# Allegro board CHOPPING_WAVE.brd
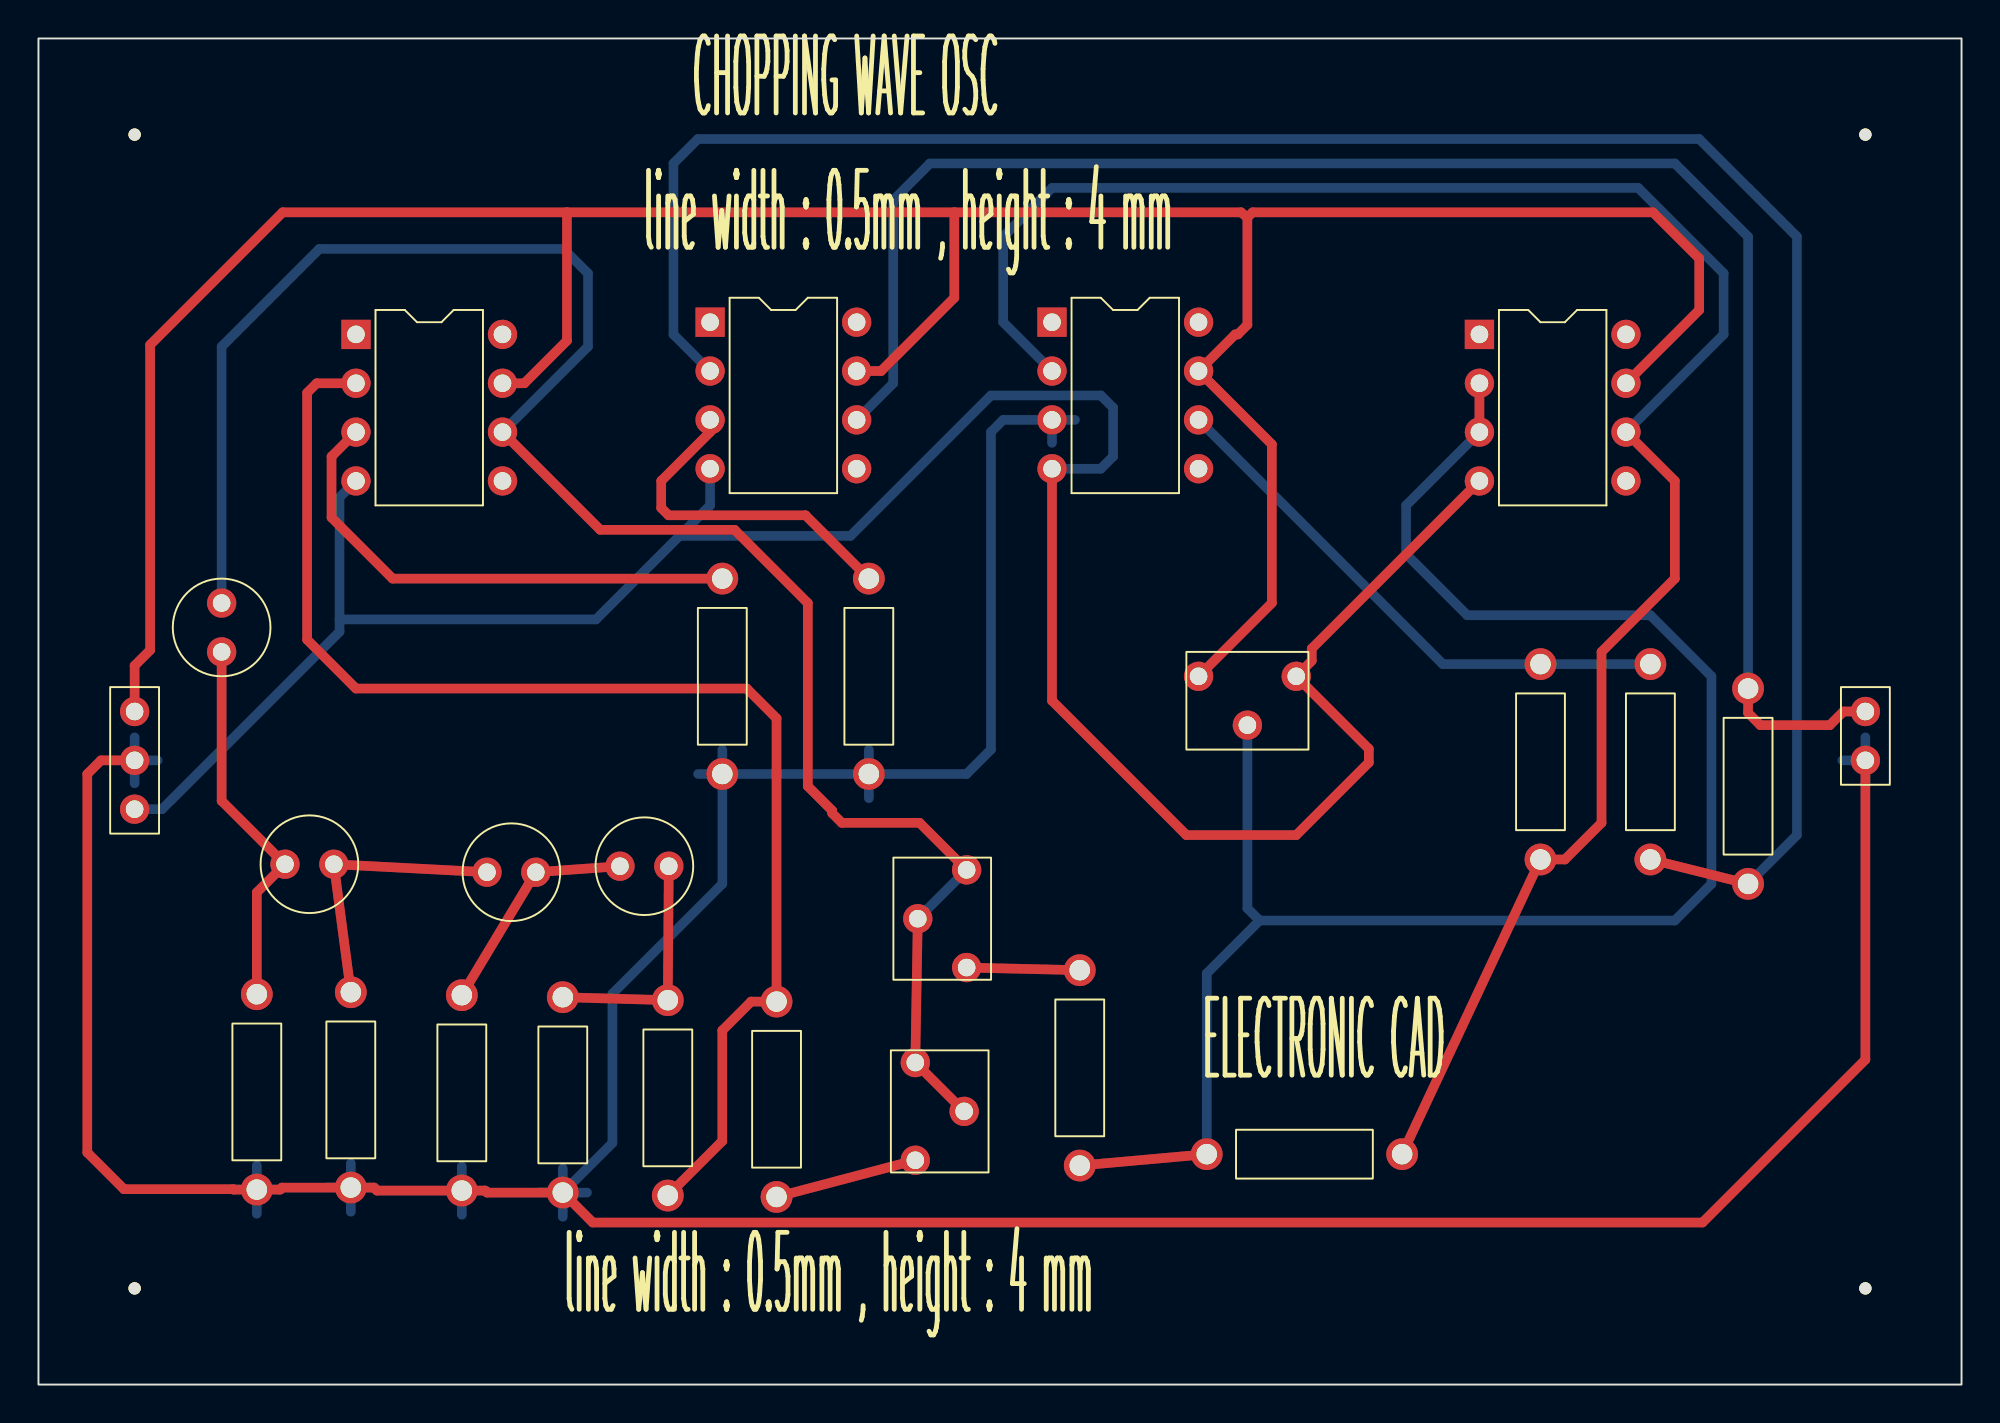
[diagram p0: board, top side]
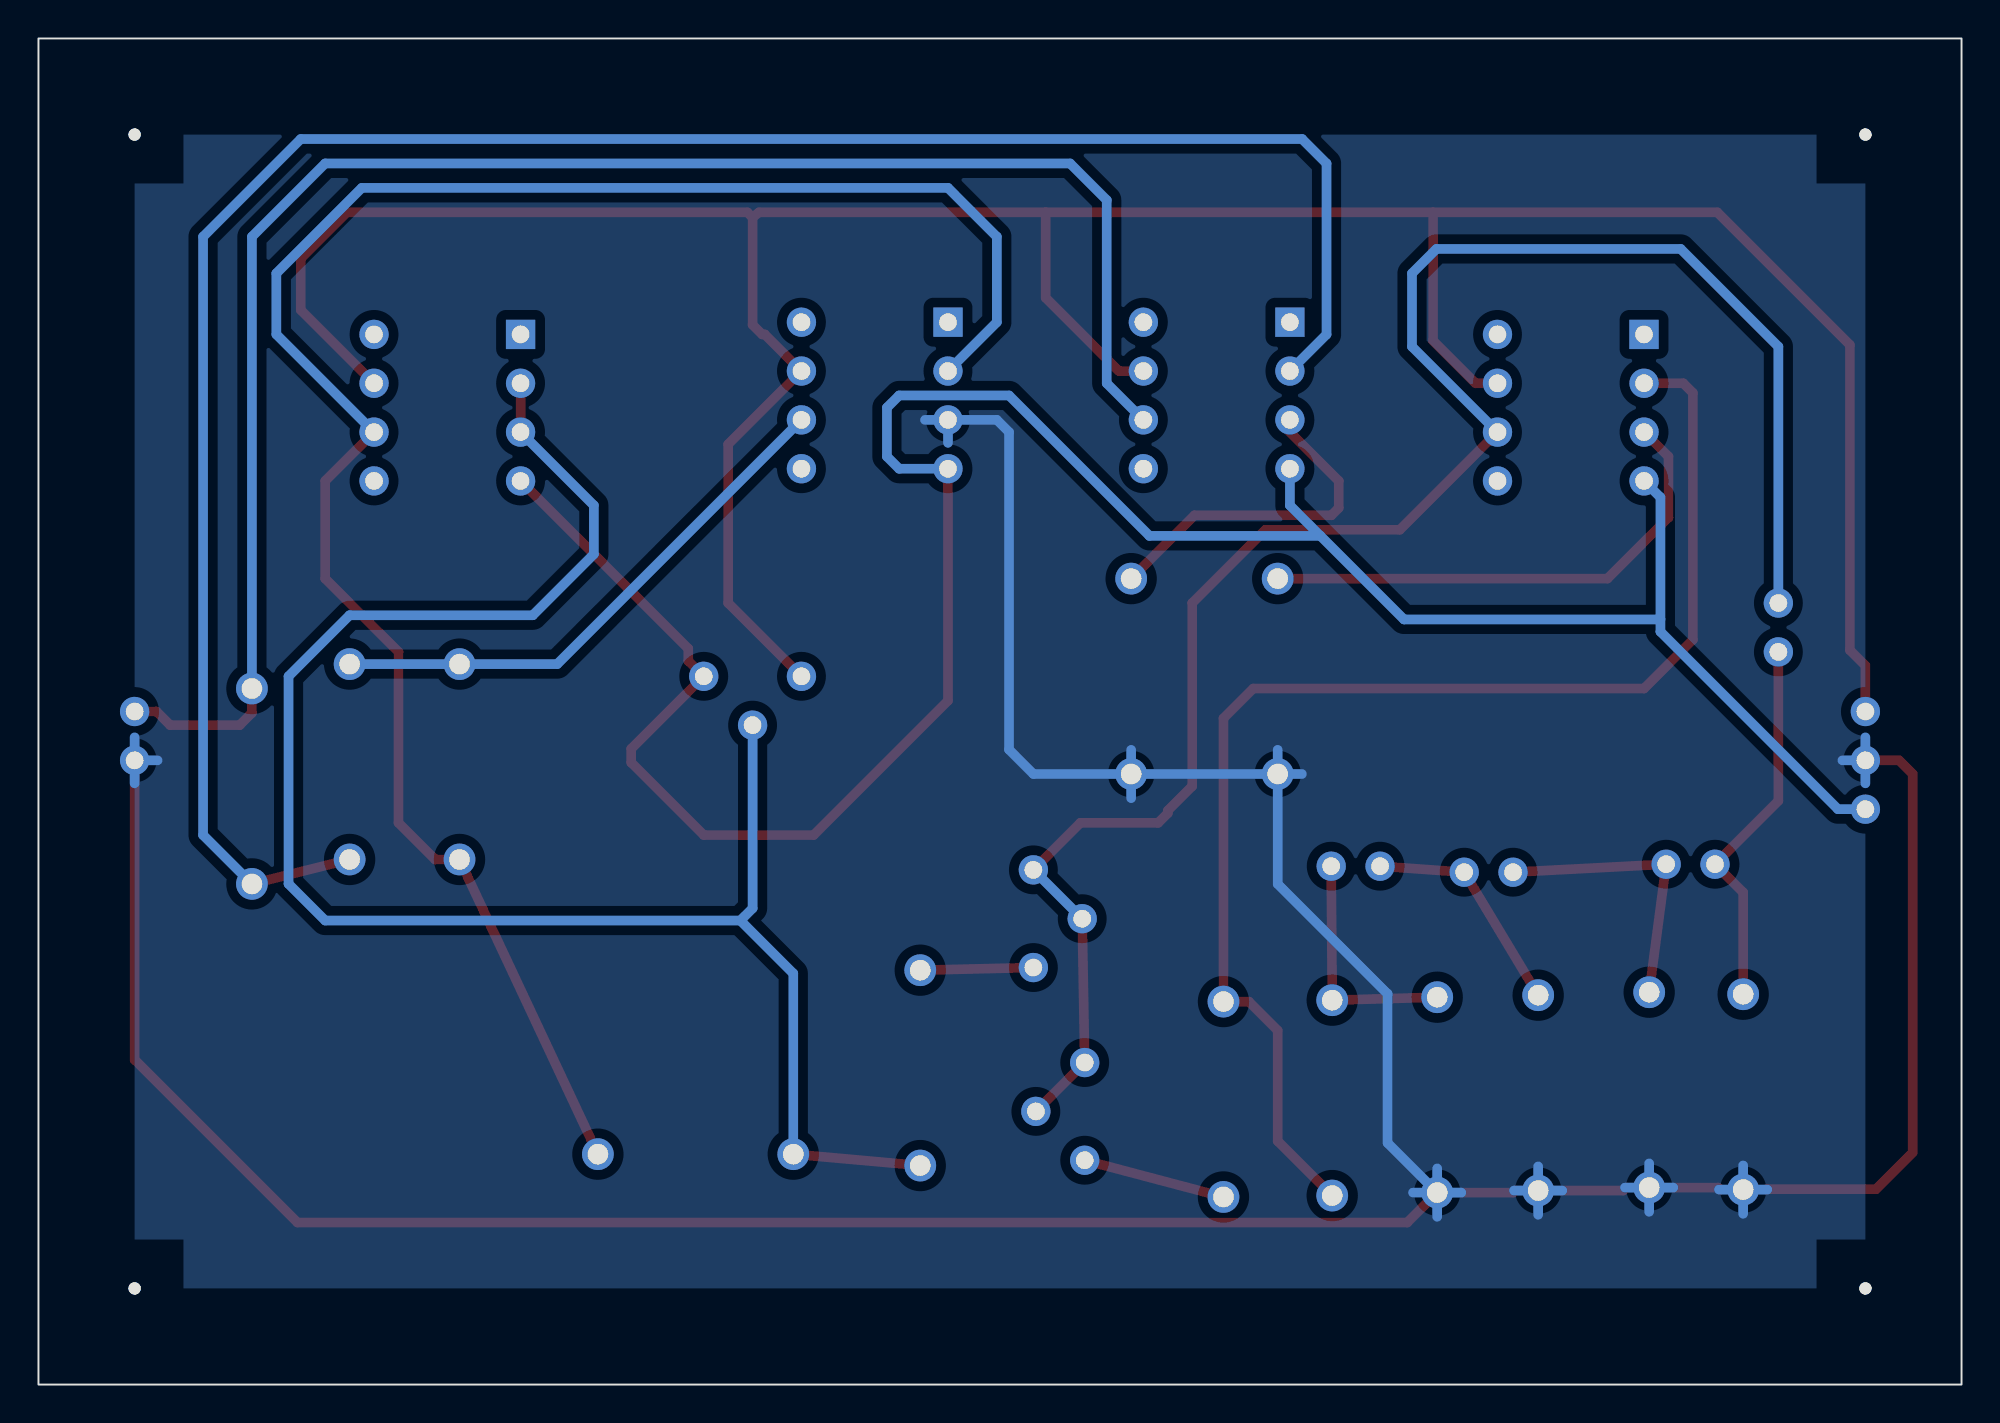
[diagram p1: board, bottom side, seen from below]

Outline 100 x 70 mm; copper layers: TOP, BOTTOM. Coordinates in mm from the lower left corner of the outline.
Outline path: rectangle 0,0 100,70

## Design rules (mm)
net group POWERRULL: nets +12V -12V
nets with their own width: min track width 0.5; nets GND N00433 N00446 N00467 N00486 N00513 N00553 N00614 N00638 N00732 N00786 N01578 N01624 N01649 OUT SIG

## Placement (name value [footprint] x y rotation side)
C1  0.001uF  [CAP196]  9.53 40.64 180 top
C2  0.001uF  [CAP196]  15.36 27.06 90 top
C3  0.001uF  [CAP196]  25.86 26.64 90 top
C4  0.001uF  [CAP196]  32.78 26.95 90 top
J1  CON2  [JUMPER2]  95 35 270 top
J2  CON3  [JUMPER3]  5 35 270 top
NOREF  -  []  100 0 90 top
NOREF#2  -  [unnamed#2]  95 5 0 top
NOREF#3  -  [unnamed#2]  95 65 0 top
NOREF#4  -  [unnamed#2]  5 65 0 top
NOREF#5  -  []  0 70 0 top
NOREF#6  -  [unnamed#2]  5 5 0 top
R1  4.7k  [RES400]  11.36 20.3 180 top
R2  4.7k  [RES400]  16.24 20.4 180 top
R3  4.7k  [RES400]  22.02 20.25 180 top
R4  4.7k  [RES400]  27.27 20.14 180 top
R5  10k  [RES400]  32.73 19.99 180 top
R6  1k  [RES400]  35.56 41.91 180 top
R7  15k  [RES400]  38.38 9.76 0 top
R8  20k  [RES400]  54.15 21.55 180 top
R9  10k  [RES400]  60.75 11.98 270 top
R10  470k  [RESADJ]  45.59 11.66 180 top
R11  100k  [RESADJ]  48.27 26.77 0 top
R12  10k  [RESADJ]  60.33 36.83 90 top
R13  8.2k  [RES400]  78.11 27.3 0 top
R14  2.2k  [RES400]  83.82 37.47 180 top
R15  10k  [RES400]  88.9 26.04 0 top
R16  5.1k  [RES400]  43.18 31.75 0 top
U1  LF356  [DIP8_3]  16.51 54.61 0 top
U2  LF356  [DIP8_3]  74.93 54.61 0 top
U3  LF356  [DIP8_3]  52.7 55.24 0 top
U4  LF356  [DIP8_3]  34.92 55.24 0 top

## Library data of the parts
C1-C4 = CAP NP: Tolerance: ***; User Part Number: ***
J1 = CON2: User Part Number: ***
J2 = CON3: User Part Number: ***
R1-R9 R13-R16 = R: Tolerance: ***; User Part Number: ***
R10-R12 = RESISTOR VAR: Tolerance: ***; User Part Number: ***
U1-U4 = LF356_0: Tolerance: ***; User Part Number: ***

## Footprints (pads in the part's own frame, mm; a bottom-side part is the same pattern mirrored in y, then rotated)
CAP196
  round 1.524 hole 0.914: 1(0,0) 2(0,2.54)
DIP8_3
  rect 1.524x1.524 hole 0.914: 1(0,0)
  round 1.524 hole 0.914: 2(0,-2.54) 3(0,-5.08) 4(0,-7.62) 5(7.62,-7.62) 6(7.62,-5.08) 7(7.62,-2.54) 8(7.62,0)
JUMPER2
  round 1.524 hole 0.914: 1(0,0) 2(2.54,0)
JUMPER3
  round 1.524 hole 0.914: 1(0,0) 2(2.54,0) 3(5.08,0)
RES400
  round 1.651 hole 1.067: 1(0,0) 2(0,10.16)
RESADJ
  round 1.524 hole 0.914: 1(0,0) 2(-2.54,-2.54) 3(0,-5.08)
unnamed#2
  round 0.635 hole 3.175 unplated: (0,0)

## Nets
+12V: J2.1 R12.1 U1.7 U2.7 U3.7 U4.7
-12V: J2.3 R12.3 U1.4(V-) U2.4(V-) U3.4(V-) U4.4(V-)
GND: J1.2 J2.2 R1.2 R2.2 R3.2 R4.2 R6.2 R16.1 U3.3
OUT: J1.1 R15.2 U4.6
SIG: R9.2 R13.1 U2.6 U3.2
N00433: C1.2 C2.2 R1.1
N00446: C1.1 R10.2(WIPER) R10.3 R11.1 R11.2(WIPER) U1.6
N00467: C2.1 C3.2 R2.1
N00486: C3.1 C4.2 R3.1
N00513: C4.1 R4.1 R5.1
N00553: R7.1 R10.1
N00614: R5.2 R7.2 U1.2
N00638: R6.1 U1.3
N00732: R8.1 R11.3
N00786: R8.2 R9.1 R12.2(WIPER) U2.2 U2.3
N01578: R13.2 R14.1 U3.6
N01624: R14.2 R15.1 U4.2
N01649: R16.2 U4.3

Pads without a net: U1 1 5 8; U2 1 5 8; U3 1 5 8; U4 1 5 8

## Routing (per net, layer and track width the routed paths; a pad name or vN(x,y) marks a point on that pad's centre or on a via; arc(x,y) is an arc through that point)
+12V: length 162.3
  TOP w0.5: 47.62,60.96 62.53,60.96 62.87,60.69 ; 47.62,60.96 47.62,56.52 43.81,52.7 U4.7 ; 47.62,60.96 27.48,60.96 ; U1.7 25.27,52.07 27.48,54.28 27.48,60.96 ; 27.48,60.96 12.7,60.96 5.81,54.07 5.81,38.19 5,37.38 J2.1 ; 62.87,60.69 62.87,55.11 62.37,54.61 62.23,54.61 U3.7 64.14,48.9 64.14,40.64 R12.1 ; 62.87,60.69 63.14,60.96 83.95,60.96 86.36,58.55 86.36,55.88 U2.7
-12V: length 131.3
  TOP w0.5: U2.4 66.21,38.27 66.21,37.64 R12.3 69.18,33.06 69.18,32.35 65.41,28.57 59.69,28.57 52.7,35.56 U3.4
  BOTTOM w0.5: U3.4 55.24,47.62 55.88,48.26 55.88,50.8 55.24,51.44 49.53,51.44 42.23,44.13 33.34,44.13 ; 33.34,44.13 34.92,45.72 U4.4 ; 33.34,44.13 28.99,39.79 15.66,39.79 ; 15.66,39.79 15.66,46.14 U1.4 ; 15.66,39.79 15.66,39.15 6.42,29.92 J2.3
GND: length 229.9
  TOP w0.5: J2.2 3.25,32.46 2.54,31.75 2.54,12.06 4.45,10.16 10.13,10.16 10.15,10.14 12.56,10.14 12.66,10.24 R2.2 17.45,10.24 17.6,10.09 R3.2 23.22,10.09 23.32,9.98 R4.2 28.82,8.43 86.53,8.43 95,16.89 J1.2
  BOTTOM w0.5: 11.36,10.14 12.61,10.14 ; 11.36,10.14 11.36,8.88 ; 11.36,10.14 11.36,11.39 ; 11.36,10.14 10.1,10.14 ; R4.2 28.52,9.98 ; R4.2 29.84,12.56 29.84,20.32 35.56,26.04 R6.2 ; R4.2 26.01,9.98 ; R4.2 27.27,8.72 ; R4.2 27.27,11.24 ; R2.2 17.5,10.24 ; R2.2 14.98,10.24 ; R2.2 16.24,11.5 ; R2.2 16.24,8.98 ; 52.7,48.97 U3.3 ; U3.3 53.9,50.16 ; U3.3 50.16,50.16 49.53,49.53 49.53,33.02 48.26,31.75 R16.1 ; 22.02,8.83 R3.2 ; R3.2 22.02,11.35 ; R3.2 20.76,10.09 ; R3.2 23.27,10.09 ; J1.2 95,33.65 ; J1.2 95,31.27 ; J1.2 93.81,32.46 ; R6.2 35.56,33.01 ; R6.2 R16.1 ; R6.2 34.3,31.75 ; R16.1 43.18,33.01 ; R16.1 43.18,30.49 ; 5,31.27 J2.2 ; J2.2 6.19,32.46 ; J2.2 5,33.65
OUT: length 90.5
  TOP w0.5: J1.1 93.86,35 93.15,34.29 89.53,34.29 88.9,34.92 R15.2
  BOTTOM w0.5: U4.6 44.45,52.07 44.45,61.59 46.35,63.5 85.09,63.5 88.9,59.69 R15.2
SIG: length 102.6
  TOP w0.5: U2.6 85.09,46.99 85.09,41.91 81.28,38.1 81.28,29.21 79.38,27.3 R13.1 R9.2
  BOTTOM w0.5: U2.6 87.63,54.61 87.63,57.78 83.19,62.23 52.7,62.23 50.16,59.69 50.16,55.24 U3.2
N00433: length 19.8
  TOP w0.5: C1.2 9.53,30.35 C2.2 11.36,25.59 R1.1
N00446: length 99
  TOP w0.5: R10.2 R10.3 R11.2 ; R11.1 45.82,29.21 41.77,29.21 41.27,29.71 41.27,29.84 40.01,31.11 40.01,40.64 36.2,44.45 29.21,44.45 U1.6
  BOTTOM w0.5: C1.1 9.53,53.98 14.61,59.05 27.3,59.05 28.57,57.78 28.57,53.98 U1.6 ; R11.1 R11.2
N00467: length 14.7
  TOP w0.5: C3.2 C2.1 R2.1
N00486: length 11.8
  TOP w0.5: R3.1 C3.1 C4.2
N00513: length 12.4
  TOP w0.5: C4.1 R5.1 R4.1
N00553: length 7.5
  TOP w0.5: R7.1 R10.1
N00614: length 69.6
  TOP w0.5: U1.2 14.47,52.07 13.97,51.57 13.97,38.73 16.51,36.2 36.83,36.2 38.38,34.65 R7.2 37.06,19.91 35.56,18.41 35.56,12.66 R5.2
N00638: length 26.6
  TOP w0.5: U1.3 15.24,48.26 15.24,45.09 18.41,41.91 R6.1
N00732: length 5.9
  TOP w0.5: 48.27,21.68 R8.1
N00786: length 94.4
  TOP w0.5: U2.2 U2.3 ; R8.2 R9.1
  BOTTOM w0.5: U2.3 71.12,45.72 71.12,43.18 74.3,40.01 83.82,40.01 87,36.83 87,26.04 85.09,24.13 63.5,24.13 ; 63.5,24.13 62.87,24.77 R12.2 ; 63.5,24.13 60.75,21.38 R9.1
N01578: length 28.8
  BOTTOM w0.5: R14.1 R13.2 73.03,37.47 U3.6
N01624: length 112.6
  TOP w0.5: 83.82,27.3 R15.1
  BOTTOM w0.5: R15.1 91.44,28.57 91.44,59.69 86.36,64.77 34.29,64.77 33.02,63.5 33.02,54.61 U4.2
N01649: length 17.9
  TOP w0.5: U4.3 34.92,49.53 32.38,46.99 32.38,45.59 32.77,45.2 39.89,45.2 R16.2

## Copper pours and planes (outline as drawn; the poured copper is in the pictures)
GND on BOTTOM: 95,5 95,65 5,65 5,5

## Text on the board
Ref Des/Silkscreen Top: line width : 0.5mm , height : 4 mm | CHOPPING WAVE OSC | ELECTRONIC CAD
TOLERANCE_TOP: FIGURE | FINISHED_SIZE | 0.9144 | 1.0668 | 3.175 | DRILL CHART: TOP to BOTTOM | ALL UNITS ARE IN MILLIMETERS | PLATED | NON-PLATED | QTY | 54 | 26 | 4
